# EAGLE board 3Buttons_3LEDs (EAGLE 9.7.0)

Size 84.55 x 125.82 mm. Coordinates in mm from the lower left corner, seen from the top.
Outline: 0,0 84.55,0 84.55,125.82 0,125.82 0,0
Copper layers (1*16): Top 0.035mm / dielectric 1.5mm / Bottom 0.035mm
Design rules "default": minimum track width 6mil, minimum drill 0.35mm, track to track 6mil, track to pad 6mil, pad to pad 6mil, via to via 6mil, smd to smd 6mil, copper to edge 40mil, drill to drill 6mil, minimum pad ring 10mil, minimum via ring 8mil, stop-mask expansion 4mil, vias tented up to drill 0mil, thermal gap 10mil

## Footprints (pad centres in the part's own frame; a part is rotated, then mirrored left to right if it is on the bottom)
LEDRD254W60D565H860B_G = drill 0.981 pad 1.581: 1 -1.27,0; 2 1.27,0
LEDRD254W60D565H860B_B = drill 0.981 pad 1.581: 1 -1.27,0; 2 1.27,0
LEDRD254W60D565H860B = drill 0.981 pad 1.581: 1 -1.27,0; 2 1.27,0
RESAD1016W63L850D250B = drill 0.83 pad 1.43: 1 -5.08,0; 2 5.08,0
SWITCH-MOMENTARY-PTH-6.5MM = drill 1.016 pad 1.88: 1 -3.251,2.261; 2 3.251,2.261; 3 -3.251,-2.261; 4 3.251,-2.261
ARDUINO-UNO-R3-SHIELD = drill 1.016 pad 1.88: 3.3V 24.13,-2.54; 5V 24.13,0; A0 24.13,12.7; A1 24.13,15.24; A2 24.13,17.78; A3 24.13,20.32; A4 24.13,22.86; A5 24.13,25.4; AREF -24.13,-13.97; D2 -24.13,20.32; D3 -24.13,17.78; D4 -24.13,15.24; D5 -24.13,12.7; D6 -24.13,10.16; D7 -24.13,7.62; D8 -24.13,3.81; D9 -24.13,1.27; D10 -24.13,-1.27; D11 -24.13,-3.81; D12 -24.13,-6.35; D13 -24.13,-8.89; GND@0 24.13,2.54; GND@1 24.13,5.08; GND@2 -24.13,-11.43; IOREF 24.13,-7.62; NC 24.13,-10.16; RES 24.13,-5.08; RX -24.13,25.4; SCL -24.13,-19.05; SDA -24.13,-16.51; TX -24.13,22.86; VIN 24.13,7.62

## Placement (x,y rotation side)
DLED2_  GREEN  [LEDRD254W60D565H860B_G]  21.3,117.91 180 top
DLED3  BLUE  [LEDRD254W60D565H860B_B]  36.54,117.91 180 top
DLED_1_  RED  [LEDRD254W60D565H860B]  6.06,117.91 180 top
R1  470  [RESAD1016W63L850D250B]  7.33,105.21 90 top
R2  10k  [RESAD1016W63L850D250B]  17.49,102.67 90 top
R3  470  [RESAD1016W63L850D250B]  22.57,105.21 90 top
R4  10k  [RESAD1016W63L850D250B]  32.73,102.67 90 top
R5  470  [RESAD1016W63L850D250B]  37.81,105.21 90 top
R6  10k  [RESAD1016W63L850D250B]  47.97,102.67 90 top
S1  SWITCH_MOMENTARY  [SWITCH-MOMENTARY-PTH-6.5MM]  12.41,103.94 90 top
S2  SWITCH_MOMENTARY  [SWITCH-MOMENTARY-PTH-6.5MM]  27.65,103.94 90 top
S3  SWITCH_MOMENTARY  [SWITCH-MOMENTARY-PTH-6.5MM]  42.89,103.94 90 top
UARDUINO  ARDUINO-UNO-R3-SHIELD  [ARDUINO-UNO-R3-SHIELD]  50.03,29.84 270 top

## Library data of the parts
DLED2_ = Tinkercad; CATEGORY: Opto-Electronic; SUB-CATEGORY: LED; VALUE: LED_GREEN
DLED3 = Tinkercad; CATEGORY: Opto-Electronic; SUB-CATEGORY: LED; VALUE: LED_BLUE
DLED_1_ = Tinkercad; CATEGORY: Opto-Electronic; SUB-CATEGORY: LED; VALUE: LED_RED
R1-R6 S1-S3 UARDUINO = Tinkercad

## Nets
DLED2__A: DLED2_.1 R3.2
DLED3_A: DLED3.1 R5.2
DLED_1__A: DLED_1_.1 R1.2
UARDUINO_5V: R2.1 R4.1 R6.1 UARDUINO.5V
UARDUINO_D2: R2.2 S1.3 S1.4 UARDUINO.D2
UARDUINO_D3: R4.2 S2.3 S2.4 UARDUINO.D3
UARDUINO_D4: R6.2 S3.3 S3.4 UARDUINO.D4
UARDUINO_D8: R1.1 UARDUINO.D8
UARDUINO_D9: R3.1 UARDUINO.D9
UARDUINO_D10: R5.1 UARDUINO.D10
UARDUINO_GND: DLED2_.2 DLED3.2 DLED_1_.2 S1.1 S1.2 S2.1 S2.2 S3.1 S3.2 UARDUINO.GND@0 UARDUINO.GND@1 UARDUINO.GND@2

## Tracks (layer width: path | path; a pad name or v marks a point on that pad's centre or on a via)
DLED2__A  (1 unrouted)
DLED3_A  (1 unrouted)
DLED_1__A  (1 unrouted)
UARDUINO_5V  (3 unrouted)
UARDUINO_D2  (3 unrouted)
UARDUINO_D3  (3 unrouted)
UARDUINO_D4  (3 unrouted)
UARDUINO_D8  (1 unrouted)
UARDUINO_D9  (1 unrouted)
UARDUINO_D10  (1 unrouted)
UARDUINO_GND  (11 unrouted)